# Altium PCB LASER_EXT_V1.2.1.PcbDoc
Units mm, origin at the board's own origin, x right, y up, seen from the top; angles counter-clockwise.
Board outline 35.5 x 54.5 mm, 2 copper layers (Top Layer, Bottom Layer); 37 components, 23 nets, 230 pads, 79 vias.
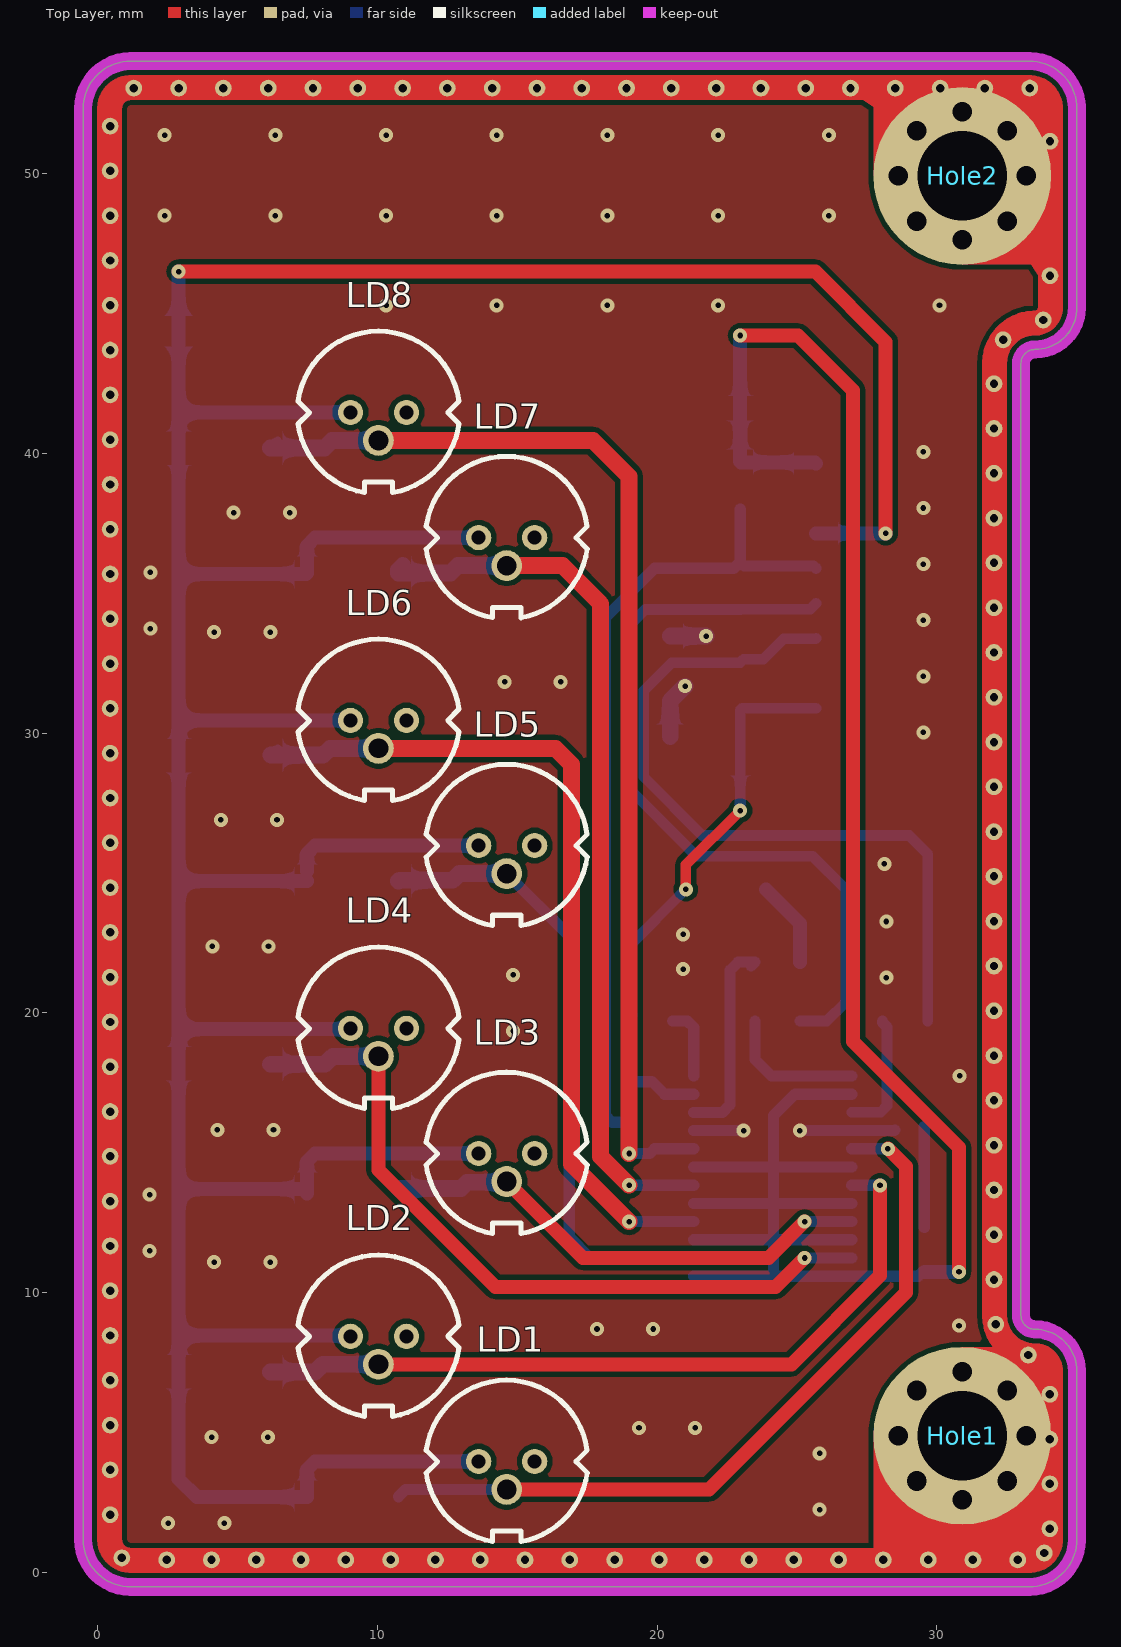
[diagram p0: Top Layer view]
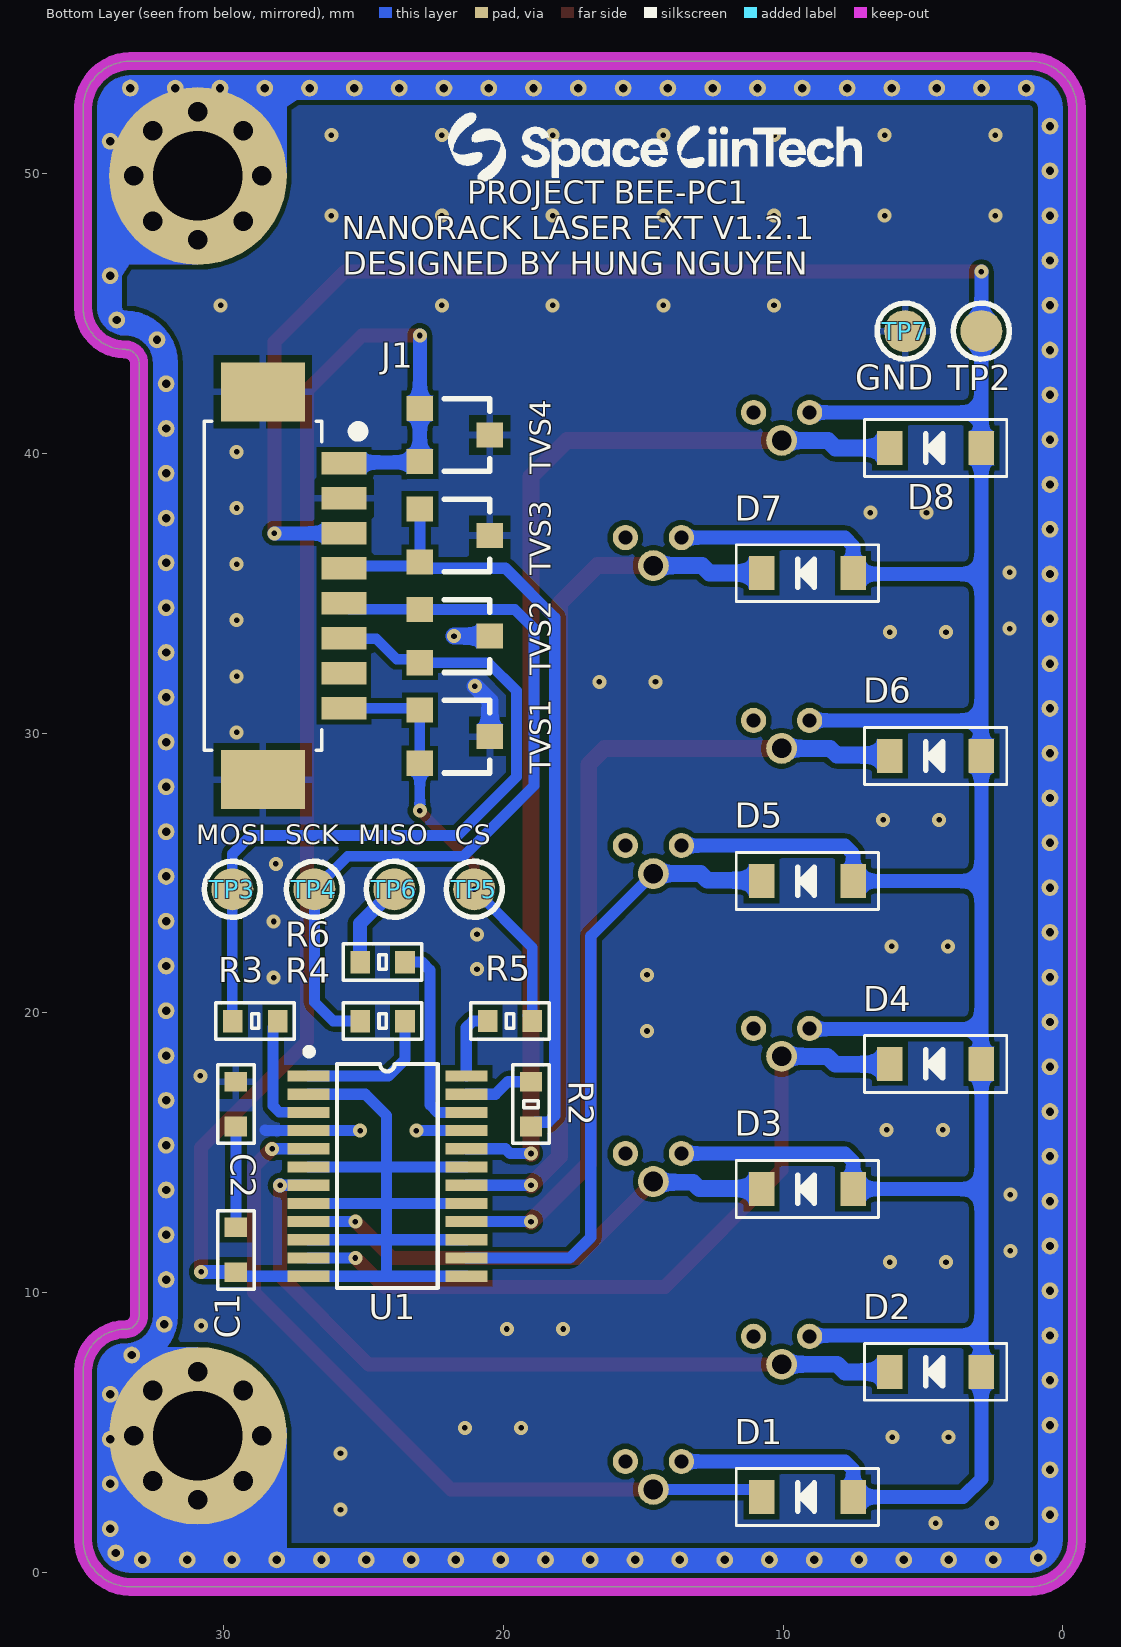
[diagram p1: Bottom Layer view, seen from below]
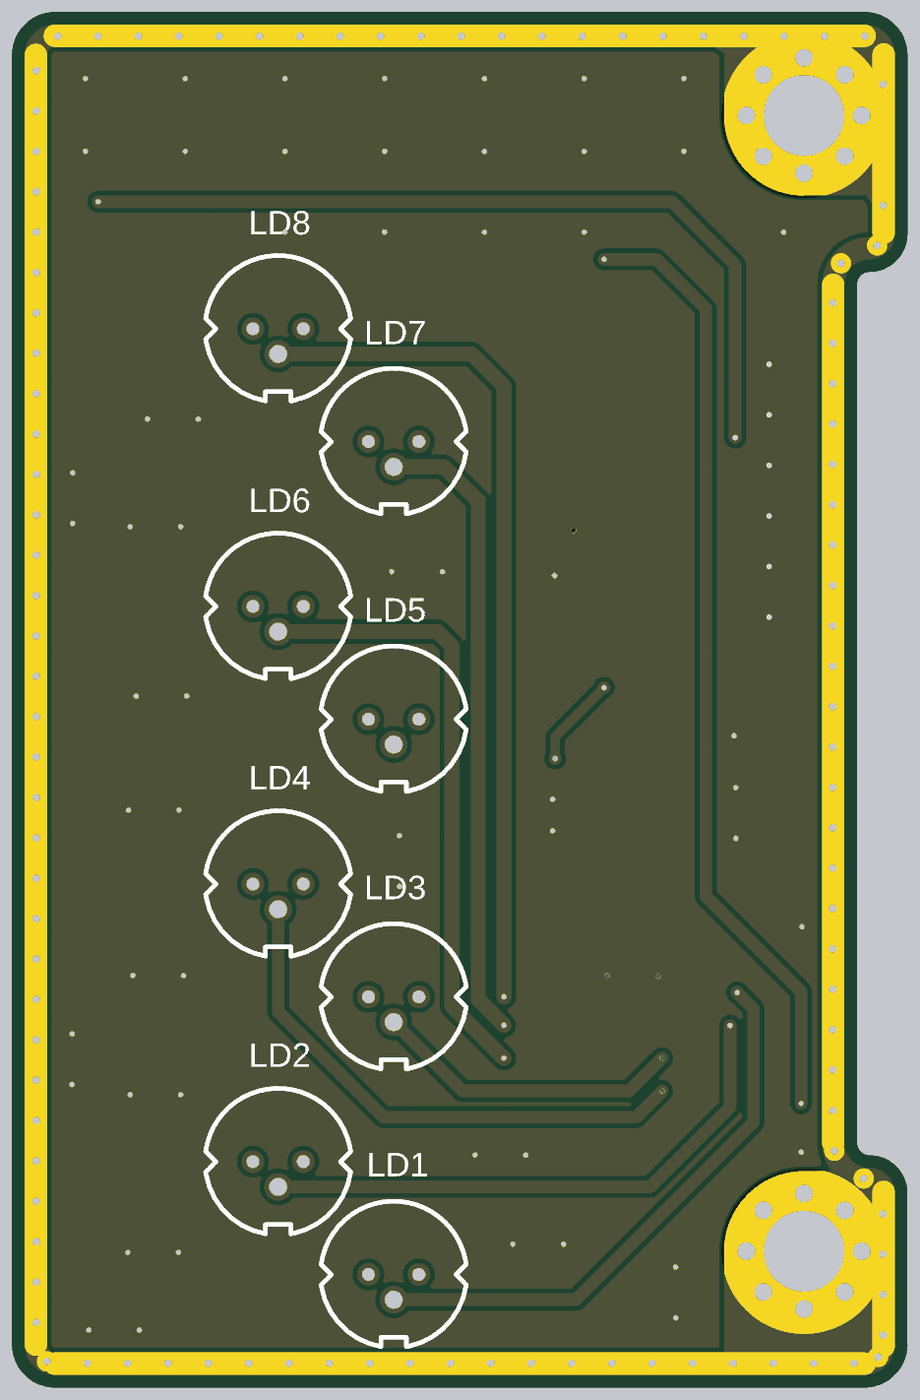
[diagram p2: 3D render of the assembled board from above, using the file's embedded part models]
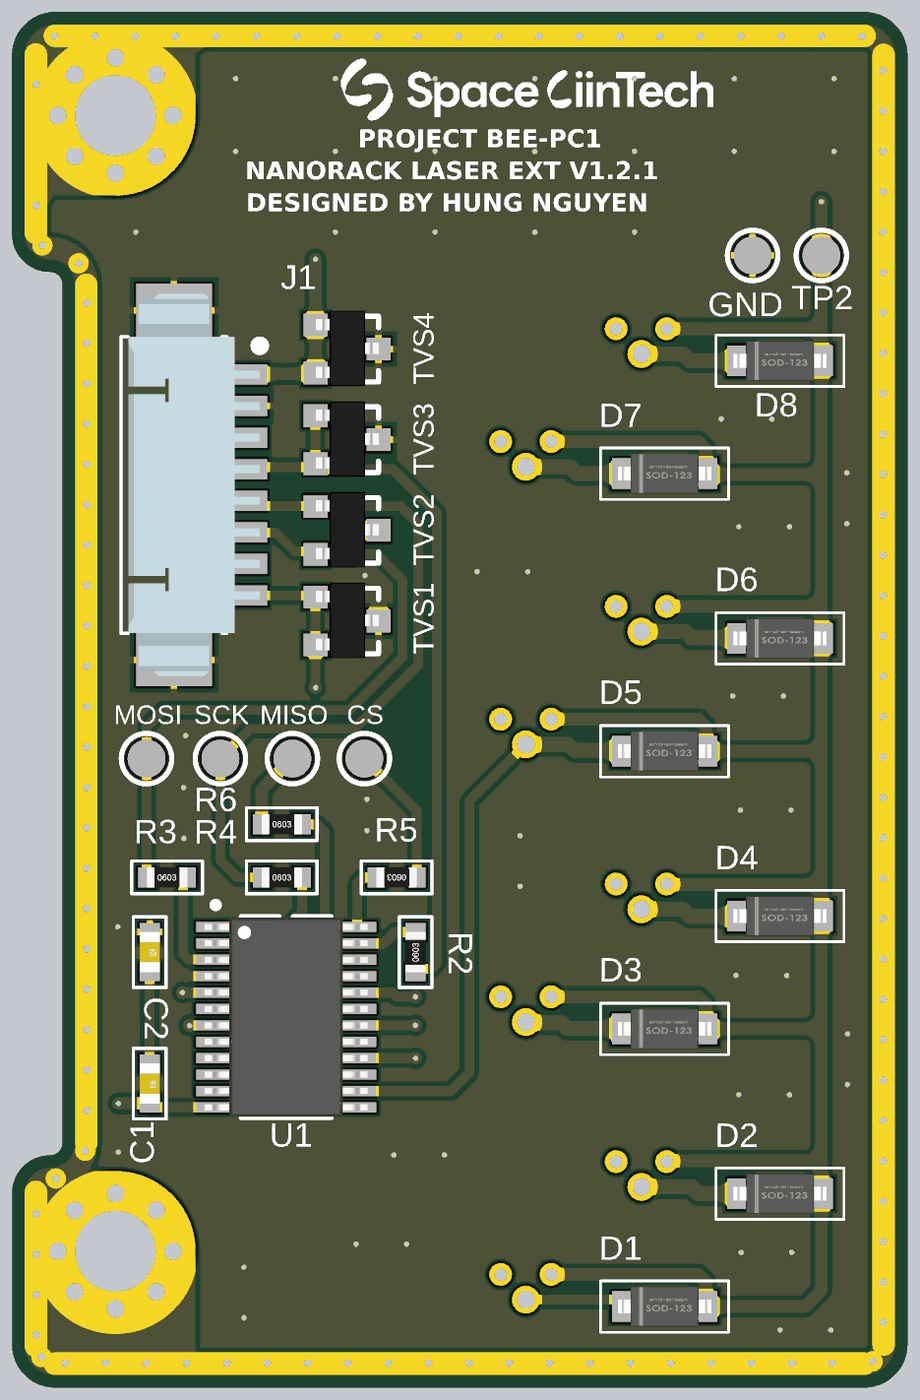
[diagram p3: 3D render of the assembled board from below, using the file's embedded part models]

## Layer stack, top to bottom
Top Solder: solder mask 0.0102, Solder Resist, Dk 3.5
Top Layer: signal copper 0.0356
Dielectric 1: dielectric 0.32, FR-4, Dk 4.8
Bottom Layer: signal copper 0.0356
Bottom Solder: solder mask 0.0102, Solder Resist, Dk 3.5

## Board outline
-0.5,1.2 ccw(c1.2,1.2) 1.2,-0.5 33.3,-0.5 ccw(c33.3,1.2) 35,1.2 34.998,1.113 34.998,7.259 cw(c34.999,7.259) 34.999,7.26 35,7.2 ccw(c33.5,7.2) 33.5,8.7 cw(c33.5,9.2) 33,9.2 33,43.19 33,43.2 cw(c33.5,43.2) 33.499,43.7 33.5,43.7 ccw(c33.5,45.2) 35,45.2 35,45.176 35,52.399 ccw(c34.997,52.399) 34.997,52.402 35,52.3 ccw(c33.3,52.3) 33.3,54 1.2,54 ccw(c1.2,52.3) -0.5,52.3

## Design rules (kind name [scope] priority, off if disabled: settings)
Clearance [NOT InNet('PROTECT_EMI') and NOT OnLayer('Keep-Out Layer')] p1: gap=0.178 ignorepadtopadclearanceinfootprint=TRUE
HoleSize [All] p1: absolutevalues=TRUE maxlimit=3.2 minlimit=0.025 maxpercent=80.000 minpercent=20.000
MinimumSolderMaskSliver [All] p1: minsoldermaskwidth=0.14
PolygonConnect [All] p1: thpad.connectstyle=Relief thpad.reliefconductorwidth=0.254 thpad.reliefentries=4 thpad.polygonreliefangle="90 Angle" thpad.airgapwidth=0.254 smdpad.connectstyle=Relief smdpad.reliefconductorwidth=0.254 smdpad.reliefentries=4 smdpad.polygonreliefangle="90 Angle" smdpad.airgapwidth=0.254 via.connectstyle=Direct via.reliefconductorwidth=0.254 via.reliefentries=4 via.polygonreliefangle="90 Angle" via.airgapwidth=0.254
RoutingVias [All] p1: holewidth=0.3 width=0.7 viastyle="Through Hole" minholewidth=0.3 minwidth=0.6 maxholewidth=0.711 maxwidth=1.27
SilkToSolderMaskClearance [IsPad] p1: minsilkscreentomaskgap=0.15 clearancetoexposedcopper=TRUE
SolderMaskExpansion [All] p1: expansion=0.102 istentingtop=FALSE
Width [All] p1: maxlimit=1.27 minlimit=0.178 preferedwidth=0.381
27 further rules are at their usual default settings.

## Classes and differential pairs
component class COMMUNICATION: Hole1 Hole2 J1 TVS1 TVS2 TVS3 TVS4
component class SWITCHING: C1 C2 D1 D2 D3 D4 D5 D6 D7 D8 LD1 LD2 LD3 LD4 LD5 LD6 LD7 LD8 q R2 R3 R4 R5 R6 TP2 TP3 TP4 TP5 TP6 TP7 U1

## Components (designator, comment, footprint, x,y, rotation, side; value= is the part's Value field where it differs from the comment)
C1 "0.22uF/25V" CN-SMD-0603 29.543,11.54 r270 bottom value=33pF
C2 "0.22uF/25V" CN-SMD-0603 29.543,16.746 r270 bottom value=33pF
D1 "1N4148W-TP" SOD123 9.13,2.71 r180 bottom value=1N5007
D2 "1N4148W-TP" SOD123 4.55,7.18 r180 bottom value=1N5007
D3 "1N4148W-TP" SOD123 9.13,13.71 r180 bottom value=1N5007
D4 "1N4148W-TP" SOD123 4.55,18.18 r180 bottom value=1N5007
D5 "1N4148W-TP" SOD123 9.13,24.71 r180 bottom value=1N5007
D6 "1N4148W-TP" SOD123 4.55,29.18 r180 bottom value=1N5007
D7 "1N4148W-TP" SOD123 9.13,35.71 r180 bottom value=1N5007
D8 "1N4148W-TP" SOD123 4.55,40.18 r180 bottom value=1N5007
Hole1 "Hole" "Hole space" 30.9,4.9 r0 top
Hole2 "Hole" "Hole space" 30.9,49.9 r0 top
J1 "0532610871" 0532610871 28.579,35.26 r270 bottom
LD1 "LaserDiode" LASER 14.63,3.98 r90 top
LD2 "LaserDiode" LASER 10.05,8.45 r90 top
LD3 "LaserDiode" LASER 14.63,14.98 r90 top
LD4 "LaserDiode" LASER 10.05,19.45 r90 top
LD5 "LaserDiode" LASER 14.63,25.98 r90 top
LD6 "LaserDiode" LASER 10.05,30.45 r90 top
LD7 "LaserDiode" LASER 14.63,36.98 r90 top
LD8 "LaserDiode" LASER 10.05,41.45 r90 top
R2 "4.7K 1%" RES-SMD-0603 19.002,16.745 r90 bottom
R3 "22R 1%" RES-SMD-0603 28.855,19.711 r180 bottom
R4 "22R 1%" RES-SMD-0603 24.304,19.711 r180 bottom
R5 "22R 1%" RES-SMD-0603 19.752,19.712 r0 bottom
R6 "22R 1%" RES-SMD-0603 24.304,21.819 r180 bottom
TP2 "Test-Point" TESTPOINT 2.915,44.354 r180 bottom
TP3 "Test-Point" TESTPOINT 29.667,24.418 r0 bottom
TP4 "Test-Point" TESTPOINT 26.738,24.418 r0 bottom
TP5 "Test-Point" TESTPOINT 21.031,24.418 r0 bottom
TP6 "Test-Point" TESTPOINT 23.884,24.418 r0 bottom
TP7 "Test-Point" TESTPOINT 5.639,44.354 r180 bottom
TVS1 "S2303" SOT23-123 21.721,29.87 r270 bottom
TVS2 "S2303" SOT23-123 21.721,33.462 r270 bottom
TVS3 "S2303" SOT23-123 21.721,37.054 r270 bottom
TVS4 "S2312" SOT23-123 21.721,40.645 r270 bottom
U1 "ADG1414BRUZ" TSSOP24 24.133,14.174 r180 bottom

## Footprints (in the part's own frame and the unit in brackets; to place one, negate y for a bottom-side part, rotate by r counter-clockwise, add the part's x,y. Pads: shape width x height; smd on the part's side, far side on the other; paste and mask are expansions set on the pad)
0532610871 [mm] "CONN HEADER SMD R/A 8POS 1.25MM"
  rect 0.8x1.6 smd: 1(-4.375,2.9) 2(-3.125,2.9) 3(-1.875,2.9) 4(-0.625,2.9) 5(0.625,2.9) 6(1.875,2.9) 7(3.125,2.9) 8(4.375,2.9)
  rect 2.1x3 smd: S1(-6.925,0) S2(6.925,0)
  silkscreen extent -5.87,-2.1 5.87,3.58, body extent -7.57,-1.8 7.57,3.4, height 3.2
CN-SMD-0603 [mm]
  rect 0.7x0.8 smd: 1(-0.8,0) 2(0.8,0)
  silkscreen extent -1.4,-0.65 1.4,0.65, body extent -0.8,-0.4 0.8,0.4, height 0.3
"Hole space" [mm]
  round 1 hole 0.7: 1(-2.286,0) 1(-1.616,-1.616) 1(-1.616,1.616) 1(0,-2.286) 1(0,2.286) 1(1.616,-1.616) 1(1.616,1.616) 1(2.286,0)
  round 6.35 hole 3.2: 1(0,0)
LASER [mm]
  round 1.1 hole 0.7 mask+0.102: 1(-1,0)
  round 0.9 hole 0.5 mask+0.102: 2(0,-1) 3(0,1)
  silkscreen extent -2.86,-2.88 2.9,2.87, body extent -2.76,-2.78 2.8,2.77, height 3.7
RES-SMD-0603 [mm]
  rect 0.7x0.8 smd: 1(-0.8,0) 2(0.8,0)
  silkscreen extent -1.4,-0.65 1.4,0.65, body extent -0.8,-0.4 0.8,0.4, height 0.43
SOD123 [mm]
  rect 0.91x1.22 smd: 1(1.635,0) 2(-1.635,0)
  silkscreen extent -2.54,-1.02 2.54,1.02, body extent -1.85,-0.8 1.85,0.8, height 1.25
SOT23-123 [mm] "SOT23, 1=bottom-left, 2=top, 3=bottom-right"
  rect 0.9x0.95 smd: 1(-0.95,-1.25) 2(0,1.25) 3(0.95,-1.25)
  silkscreen extent -1.3,-0.38 1.3,1.25, body extent -1.52,-1.23 1.48,1.27, height 1.06
TESTPOINT [mm]
  round 1.5 smd: 1(0,0)
  silkscreen extent -1,-1 1,1
TSSOP24 [mm] "TSSOP, 24-Leads, Body 7.80x4.40mm, Pitch 0.65mm, IPC High Density"
  rect 1.5x0.4 smd: 1(-2.819,3.575) 2(-2.819,2.925) 3(-2.819,2.275) 4(-2.819,1.625) 5(-2.819,0.975) 6(-2.819,0.325) 7(-2.819,-0.325) 8(-2.819,-0.975) 9(-2.819,-1.625) 10(-2.819,-2.275) 11(-2.819,-2.925) 12(-2.819,-3.575) 13(2.819,-3.575) 14(2.819,-2.925) 15(2.819,-2.275) 16(2.819,-1.625) 17(2.819,-0.975) 18(2.819,-0.325) 19(2.819,0.325) 20(2.819,0.975) 21(2.819,1.625) 22(2.819,2.275) 23(2.819,2.925) 24(2.819,3.575)
  silkscreen extent -2.91,-4 1.8,4.56, body extent -3.23,-3.95 3.23,3.95, height 1.25

## Part data
C1 C2: library part CN, "CAP CER 0.22UF 25V X7R 0603"
D1 D2 D3 D4 D5 D6 D7 D8: library part "Diode SMD", "DIODE STANDARD 100V 150MA SOD123", Code - JEDEC=DO-214-AB, Published=8-Jun-2000, Publisher="Altium Limited", Revision="July-2002: Re-released for DXP Platform."
J1: library part "Header8 - Shield", "CONN HEADER SMD R/A 8POS 1.25MM"
LD1 LD2 LD3 LD4 LD5 LD6 LD7 LD8: library part LASER
R2: library part Res-SMD, "RES SMD 4.7K OHM 1% 1/10W 0603", Manufacturer="Generic Components", Class=Passive, Published=08/06/2000, Publisher="Altium Hobart Technology Centre"
R3 R4 R5 R6: library part Res-SMD, "Resistor", Manufacturer="Generic Components", Class=Passive, Published=08/06/2000, Publisher="Altium Hobart Technology Centre"
TVS1 TVS2 TVS3: "TVS DIODE 3.3VWM 8VC SOT233"
TVS4: library part S2315, "TVS DIODE 12VWM 19VC SOT233"
U1: "IC SW SPST-NOX8 11.5OHM 24TSSOP"

## Free pads (board coordinates)
  round 0.6 hole 0.3: 1(0.464,2.078) 1(0.464,3.678) 1(0.464,5.278) 1(0.464,6.878) 1(0.464,8.478) 1(0.464,10.078) 1(0.464,11.678) 1(0.464,13.278) 1(0.464,14.878) 1(0.464,16.478) 1(0.464,18.078) 1(0.464,19.678) 1(0.464,21.278) 1(0.464,22.878) 1(0.464,24.478) 1(0.464,26.078) 1(0.464,27.678) 1(0.464,29.278) 1(0.464,30.878) 1(0.464,32.478) 1(0.464,34.078) 1(0.464,35.678) 1(0.464,37.278) 1(0.464,38.878) 1(0.464,40.478) 1(0.464,42.078) 1(0.464,43.678) 1(0.464,45.278) 1(0.464,46.878) 1(0.464,48.478) 1(0.464,50.078) 1(0.464,51.678) 1(0.886,0.535) 1(1.311,53.036) 1(2.484,0.464) 1(2.911,53.036) 1(4.084,0.464) 1(4.511,53.036) 1(5.684,0.464) 1(6.111,53.036) 1(7.284,0.464) 1(7.711,53.036) 1(8.884,0.464) 1(9.311,53.036) 1(10.484,0.464) 1(10.911,53.036) 1(12.084,0.464) 1(12.511,53.036) 1(13.684,0.464) 1(14.111,53.036) 1(15.284,0.464) 1(15.711,53.036) 1(16.884,0.464) 1(17.311,53.036) 1(18.484,0.464) 1(18.911,53.036) 1(20.084,0.464) 1(20.511,53.036) 1(21.684,0.464) 1(22.111,53.036) 1(23.284,0.464) 1(23.711,53.036) 1(24.884,0.464) 1(25.311,53.036) 1(26.484,0.464) 1(26.911,53.036) 1(28.084,0.464) 1(28.511,53.036) 1(29.684,0.464) 1(30.111,53.036) 1(31.284,0.464) 1(31.711,53.036) 1(32.036,10.477) 1(32.036,12.077) 1(32.036,13.677) 1(32.036,15.277) 1(32.036,16.877) 1(32.036,18.477) 1(32.036,20.077) 1(32.036,21.677) 1(32.036,23.277) 1(32.036,24.877) 1(32.036,26.477) 1(32.036,28.077) 1(32.036,29.677) 1(32.036,31.277) 1(32.036,32.877) 1(32.036,34.477) 1(32.036,36.077) 1(32.036,37.677) 1(32.036,39.277) 1(32.036,40.877) 1(32.036,42.477) 1(32.1,8.878) 1(32.362,44.043) 1(32.884,0.464) 1(33.265,7.781) 1(33.311,53.037) 1(33.796,44.752) 1(33.833,0.711) 1(34.033,1.578) 1(34.033,3.178) 1(34.033,4.778) 1(34.033,6.378) 1(34.035,46.334) 1(34.035,51.134)

## Via types
v1: diameter 0.5, hole 0.2, Top Layer to Bottom Layer, tented both sides, 79 vias

## Nets (pads, with @x,y where several pads share a name; then routed paths per layer and width w, separated by ;. In a path a pad name is that pad's centre, name@x,y a point inside that pad or via, vN(x,y) a via of type N, cw(c..) or ccw(c..) an arc to the next point about the centre after c; other vN are vias at no path point)
12V_EXP: C1.2 J1.1 TVS4.1 TVS4.3 U1.2 U1.6 U1.8 U1.10 U1.12 U1.13 U1.15 U1.17 U1.19 | length 80.5
  Top Layer w0.5: v1(22.971,44.2) 25.043,44.2 27,42.242 27,18.974 30.785,15.189 v1@30.785,10.77
  Bottom Layer w0.4: U1.13 24.21,10.599 ; U1.15 24.158,11.899 ; U1.17 24.158,13.199 ; U1.19 21.864,14.499 24.158,14.499 ; U1.10 24.158,11.899 ; U1.8 24.158,13.199 ; U1.6 24.158,14.499 ; U1.2 24.924,17.099 24.158,16.333 24.158,14.499 ; C1.2 C1.2@29.558,10.755 ; C1.2@29.543,10.763 29.493,10.763 29.329,10.599 U1.12 24.21,10.599 ; v1@30.77,10.755 v1@30.785,10.77 ; 24.158,11.899 24.158,13.199 ; 24.158,11.899 24.158,10.65 24.21,10.599 ; 24.158,13.199 24.158,14.499
  Bottom Layer w0.5: v1(22.971,44.2) TVS4.1 TVS4.3 23.001,39.665 25.649,39.665 J1.1 ; C1.2@29.558,10.755 v1@30.77,10.755
  other v1: 30.785,10.755
+3.3: J1.4 R2.1 TVS3.1 TVS3.3 | length 29.1
  Bottom Layer w0.4: R2.1 18.852,16.095 18.389,16.095 18.155,16.33 18.155,34.131 19.908,35.885 22.752,35.885 TVS3.3 ; TVS3.1 TVS3.3 ; J1.4 25.594,35.97 23.104,35.97 TVS3.3
GND: C2.1 J1.2 J1.S1 J1.S2 TP7.1 TVS1.2 TVS2.2 TVS3.2 TVS4.2 U1.4 U1.21 | length 8.5
  Bottom Layer w0.4: U1.21 22.247,15.799 v1(23.097,15.799) ; v1(25.104,15.799) U1.4 28.473,15.799 28.499,15.824
  Bottom Layer w0.6: TVS1.2 20.471,31.139 v1(21.006,31.674) ; TVS2.2 v1(21.753,33.462)
  other v1: 2.54,1.778 4.547,1.778 25.806,2.261 25.806,4.268 4.089,4.851 6.096,4.851 19.355,5.182 21.362,5.182 17.856,8.712 19.863,8.712 30.785,8.829 4.178,11.1 6.185,11.1 1.88,11.506 1.88,13.513 4.292,15.824 6.299,15.824 30.81,17.755 14.859,19.355 28.194,21.26 14.859,21.362 20.93,21.565 4.115,22.377 6.122,22.377 20.93,22.809 28.194,23.267 28.118,25.324 4.42,26.899 6.427,26.899 29.515,30.023 14.554,31.826 16.561,31.826 29.515,32.027 4.178,33.604 6.185,33.604 1.905,33.731 29.515,34.031 1.905,35.738 29.515,36.035 4.876,37.871 6.883,37.871 29.515,38.039 29.515,40.043 10.321,45.278 14.275,45.278 18.229,45.278 22.183,45.278 30.091,45.278 2.413,48.478 6.367,48.478 10.321,48.478 14.275,48.478 18.229,48.478 22.183,48.478 26.137,48.478 2.413,51.359 6.367,51.359 10.321,51.359 14.275,51.359 18.229,51.359 22.183,51.359 26.137,51.359
I_LD_EXT: D1.1 D2.1 D3.1 D4.1 D5.1 D6.1 D7.1 D8.1 J1.3 LD1.3 LD2.3 LD3.3 LD4.3 LD5.3 LD6.3 LD7.3 LD8.3 TP2.1 | length 148.3
  Top Layer w0.5: v1(2.915,46.482) 25.654,46.482 28.169,43.967 v1(28.169,37.135)
  Bottom Layer w0.5: v1(2.915,46.482) TP2.1 2.915,41.45 ; D7.1@7.463,35.678 2.915,35.678 ; D3.1@7.495,13.555 7.495,14.687 7.788,14.98 LD3.3@13.36,14.98 ; D3.1 2.915,13.71 ; D5.1 2.915,24.71 ; D5.1@7.495,25.07 7.495,25.687 7.788,25.98 LD5.3@13.36,25.98 ; D7.1 7.495,36.687 7.788,36.98 LD7.3@13.36,36.98 ; LD6.3@8.75,30.45 2.915,30.45 ; LD2.3@8.752,8.478 2.915,8.478 ; LD4.3@8.752,19.422 2.915,19.422 ; LD8.3@8.773,41.45 2.915,41.45 ; LD1.3@13.36,3.98 7.788,3.98 7.495,3.687 D1.1 3.564,2.71 2.915,3.359 D2.1 2.915,8.478 ; J1.3 v1(28.169,37.135) ; 2.915,8.478 2.915,13.71 ; 2.915,13.71 D4.1 2.915,19.422 ; 2.915,19.422 2.915,24.71 ; 2.915,24.71 D6.1 2.915,30.45 ; 2.915,30.45 2.915,35.678 ; 2.915,35.678 D8.1 2.915,41.45
MOSI_LD: J1.6 R3.1 TP3.1 TVS2.3 | length 27.3
  Bottom Layer w0.381: J1.6 25.664,33.37 24.531,33.37 23.795,32.633 23.092,32.633 TVS2.3 20.523,32.512 19.522,31.511 19.522,28.435 21.617,26.34 29.007,26.34 29.667,25.679 TP3.1 R3.1@29.667,19.711
NetC1_1: C1.1 C2.2 | length 3.6
  Bottom Layer w0.4: C1.1 C2.2
NetD1_2: D1.2 LD1.1 U1.5 | length 27.9
  Top Layer w0.5: LD1.1 21.852,2.98 28.892,10.02 28.892,14.516 v1@28.245,15.164
  Bottom Layer w0.4: D1.2 10.765,2.725 11.02,2.98 LD1.1 ; U1.5 v1@28.23,15.149
  other v1: 28.245,15.149
NetD2_2: D2.2 LD2.1 U1.7 | length 27.5
  Top Layer w0.5: LD2.1 24.798,7.45 27.965,10.617 v1(27.965,13.843)
  Bottom Layer w0.4: U1.7 27.96,13.849 v1(27.965,13.843)
  Bottom Layer w0.5: v1(27.965,13.843) v1@27.971,13.849
  Bottom Layer w0.6: D2.2 7.79,7.18 8.06,7.45 LD2.1
NetD3_2: D3.2 LD3.1 U1.9 | length 18.1
  Top Layer w0.5: LD3.1 17.361,11.249 23.974,11.249 v1(25.274,12.549)
  Bottom Layer w0.279: D3.2 D3.2@10.873,13.818
  Bottom Layer w0.4: v1@25.273,12.548 v1(25.274,12.549) U1.9
  Bottom Layer w0.6: D3.2@10.785,13.73 12.993,13.73 13.214,13.95 LD3.1@14.6,13.95
NetD4_2: D4.2 LD4.1 U1.11 | length 27.2
  Top Layer w0.5: LD4.1 10.05,14.385 14.224,10.211 24.236,10.211 v1(25.274,11.249)
  Bottom Layer w0.279: D4.2 D4.2@6.268,18.263
  Bottom Layer w0.4: v1(25.274,11.249) U1.11
  Bottom Layer w0.6: D4.2@6.196,18.169 8.136,18.169 8.417,18.45 LD4.1
NetD5_2: D5.2 LD5.1 U1.14 | length 22.6
  Bottom Layer w0.4: LD5.1 16.866,22.744 16.866,11.989 17.606,11.249 U1.14
  Bottom Layer w0.6: D5.2 10.795,24.74 12.7,24.74 12.94,24.98 LD5.1
NetD6_2: D6.2 LD6.1 U1.16 | length 30.9
  Top Layer w0.6: LD6.1 16.372,29.45 16.942,28.88 16.942,14.609 v1(19.002,12.549)
  Bottom Layer w0.279: D6.2 6.215,29.21 D6.2@6.455,29.45
  Bottom Layer w0.4: v1(19.002,12.549) U1.16
  Bottom Layer w0.6: D6.2@6.215,29.21 8.077,29.21 8.317,29.45 LD6.1
NetD7_2: D7.2 LD7.1 U1.18 | length 31.7
  Top Layer w0.6: LD7.1 16.623,35.98 17.983,34.62 17.983,14.868 v1(19.002,13.849)
  Bottom Layer w0.4: v1(19.002,13.849) U1.18
  Bottom Layer w0.6: D7.2@10.92,35.98 10.765,35.825 D7.2 10.767,35.712 12.624,35.712 12.891,35.98 LD7.1
NetD8_2: D8.2 LD8.1 U1.20 | length 40.4
  Top Layer w0.6: LD8.1 17.716,40.45 19.002,39.164 v1(19.002,14.98)
  Bottom Layer w0.279: D8.2 D8.2@6.455,40.45
  Bottom Layer w0.4: v1(19.002,14.98) 19.745,14.98 19.914,15.149 U1.20
  Bottom Layer w0.6: D8.2 8.125,40.18 8.395,40.45 LD8.1
NetR2_2: R2.2 U1.23 | length 2.5
  Bottom Layer w0.4: R2.2 19.818,17.545 20.265,17.099 U1.23
NetR3_2: R3.2 U1.3 | length 4.5
  Bottom Layer w0.381: U1.3 26.962,16.458 27.992,16.458 28.215,16.681 28.215,19.5 28.055,19.661 R3.2
NetR4_2: R4.2 U1.1 | length 5.1
  Bottom Layer w0.4: R4.2 23.504,18.338 24.093,17.749 U1.1
NetR5_2: R5.2 U1.24 | length 2.6
  Bottom Layer w0.4: R5.2 21.079,19.712 21.314,19.478 U1.24
NetR6_1: R6.1 TP6.1 | length 3.1
  Bottom Layer w0.5: TP6.1 25.104,23.198 R6.1
NetR6_2: R6.2 U1.22 | length 7.4
  Bottom Layer w0.4: U1.22 22.333,16.449 22.608,16.724 22.608,21.523 22.903,21.819 R6.2@23.499,21.819 ; R6.2@23.354,21.673 R6.2@23.499,21.819 ; R6.2 R6.2@23.499,21.819
PROTECT_EMI: Hole1.1 Hole2.1 pad.1 | length 346.7
  Top Layer w0.889: 32.056,43.19 32.056,9.2 ccw(c33.5,9.2) 33.5,7.756 cw(c33.5,7.2) 34.053,7.249 34.053,1.142 cw(c33.3,1.2) 33.3,0.445 1.2,0.445 cw(c1.2,1.2) 0.445,1.2 0.445,52.3 cw(c1.2,52.3) 1.2,53.056 33.3,53.056 cw(c33.3,52.3) 34.053,52.358 ; 32.056,43.204 cw(c33.5,43.2) 33.497,44.644 ; 33.501,44.644 ccw(c33.5,45.2) 34.053,45.144 ; 34.052,45.176 cw(c34.997,45.176) 34.055,45.252 34.055,52.316
  Bottom Layer w0.889: 32.056,43.19 32.056,9.2 ccw(c33.5,9.2) 33.5,7.756 cw(c33.5,7.2) 34.053,7.249 34.053,1.142 cw(c33.3,1.2) 33.3,0.445 1.2,0.445 cw(c1.2,1.2) 0.445,1.2 0.445,52.3 cw(c1.2,52.3) 1.2,53.056 33.3,53.056 cw(c33.3,52.3) 34.053,52.358 ; 32.056,43.204 cw(c33.5,43.2) 33.497,44.644 ; 33.501,44.644 ccw(c33.5,45.2) 34.053,45.144 ; 34.052,45.176 cw(c34.997,45.176) 34.055,45.252 34.055,52.316
SCK_LD: J1.5 R4.1 TP4.1 TVS2.1 | length 28.1
  Bottom Layer w0.381: TVS2.1 19.578,34.412 18.897,33.731 18.897,28.118 21.412,25.603 25.552,25.603 TP4.1 26.738,20.388 26.061,19.711 R4.1 ; TVS2.1@22.985,34.426 25.471,34.426 J1.5
SW_EXT_CS: J1.8 R5.1 TP5.1 TVS1.1 TVS1.3 | length 15.6
  Top Layer w0.381: v1(21.031,24.418) 21.031,25.289 v1(22.971,27.229)
  Bottom Layer w0.381: R5.1 R5.1@18.952,19.762 ; R5.1@19.112,19.922 R5.1@18.952,19.762 ; v1(21.031,24.418) 18.952,22.339 R5.1@18.952,19.762 ; v1(22.971,27.229) TVS1.3 TVS1.1 ; TVS1.1@23.035,30.885 J1.8
pads on no net: J1.7 LD1.2 LD2.2 LD3.2 LD4.2 LD5.2 LD6.2 LD7.2 LD8.2

## Polygon pours and split planes (outlines as drawn)
GND on Top Layer "GND_L01_P000" (solid, pour order 0): -0.5,1.2 ccw(c1.2,1.2) 1.2,-0.5 33.3,-0.5 ccw(c33.3,1.2) 35,1.2 34.998,1.113 34.998,7.259 cw(c34.999,7.259) 34.999,7.26 35,7.2 ccw(c33.5,7.2) 33.5,8.7 cw(c33.5,9.2) 33,9.2 33,43.19 33,43.2 cw(c33.5,43.2) 33.499,43.7 33.5,43.7 ccw(c33.5,45.2) 35,45.2 35,45.176 35,52.399 ccw(c34.997,52.399) 34.997,52.402 35,52.3 ccw(c33.3,52.3) 33.3,54 1.2,54 ccw(c1.2,52.3) -0.5,52.3
GND on Bottom Layer "GND_L02_P001" (solid, pour order 1): -0.5,1.2 ccw(c1.2,1.2) 1.2,-0.5 33.3,-0.5 ccw(c33.3,1.2) 35,1.2 34.998,1.113 34.998,7.259 cw(c34.999,7.259) 34.999,7.26 35,7.2 ccw(c33.5,7.2) 33.5,8.7 cw(c33.5,9.2) 33,9.2 33,43.19 33,43.2 cw(c33.5,43.2) 33.499,43.7 33.5,43.7 ccw(c33.5,45.2) 35,45.2 35,45.176 35,52.399 ccw(c34.997,52.399) 34.997,52.402 35,52.3 ccw(c33.3,52.3) 33.3,54 1.2,54 ccw(c1.2,52.3) -0.5,52.3

## Keep-outs
Keep-Out Layer:
  lines w0.644: 33,43.19 33,9.2 ccw(c33.5,9.2) 33.5,8.7 cw(c33.5,7.2) 35,7.2 ; 33,43.2 cw(c33.5,43.2) 33.499,43.7 ; 33.5,43.7 ccw(c33.5,45.2) 35,45.2 ; 34.997,45.176 ccw(c35,45.176) 35,45.173 ; 34.997,52.402 cw(c34.997,52.399) 35,52.399 35,45.176 ; 34.997,52.405 cw(c34.997,52.402) 35,52.402 ; 34.998,1.113 34.998,7.259 cw(c34.999,7.259) 34.999,7.26 ; 35,1.2 cw(c33.3,1.2) 33.3,-0.5 1.2,-0.5 cw(c1.2,1.2) -0.5,1.2 -0.5,52.3 cw(c1.2,52.3) 1.2,54 33.3,54 cw(c33.3,52.3) 35,52.3

## Other copper
Top Layer:
  rectangle net PROTECT_EMI: 30.836,3.489 33.706,8.077
  rectangle net PROTECT_EMI: 30.9,46.736 34.055,48.6
  rectangle net PROTECT_EMI: 27.725,49.9 34.055,53.056
  rectangle net PROTECT_EMI: 27.725,0.445 31.648,5.055
  rectangle net PROTECT_EMI: 30.9,0.445 34.053,6.775
Bottom Layer:
  rectangle net PROTECT_EMI: 27.725,49.9 34.055,53.056
  region net PROTECT_EMI: 33.731,4.382 33.731,8.077 30.9,8.077 30.9,4.382
  rectangle net PROTECT_EMI: 27.725,0.445 30.9,5.182
  rectangle net PROTECT_EMI: 30.9,0.445 34.053,6.775
  rectangle net PROTECT_EMI: 30.9,46.736 34.055,48.6

## Silkscreen, mask and mechanical layers (free items; w line width, h text height)
Bottom Overlay:
  drawing of 17 lines, arcs and shapes, not listed
  text "PROJECT BEE-PC1" at 21.285,48.641 h1.4
  text "NANORACK LASER EXT V1.2.1" at 25.76,47.368 h1.4
  text "DESIGNED BY HUNG NGUYEN" at 25.718,46.101 h1.4
  text "GND" at 7.417,41.952 h1.52
  text "CS" at 21.732,25.794 h1.2
  text "MISO" at 25.171,25.794 h1.2
  text "SCK" at 27.788,25.794 h1.2
  text "MOSI" at 30.963,25.794 h1.2